# Altium PCB Arduino_pads.PcbDoc
Units mm, origin at the board's own origin, x right, y up, seen from the top; angles counter-clockwise.
Board outline 197.87 x 103.12 mm, 2 copper layers (Top Layer, Bottom Side); 113 components, 62 nets, 325 pads, 0 vias.
Unrouted connection lines stored in the file: 35.
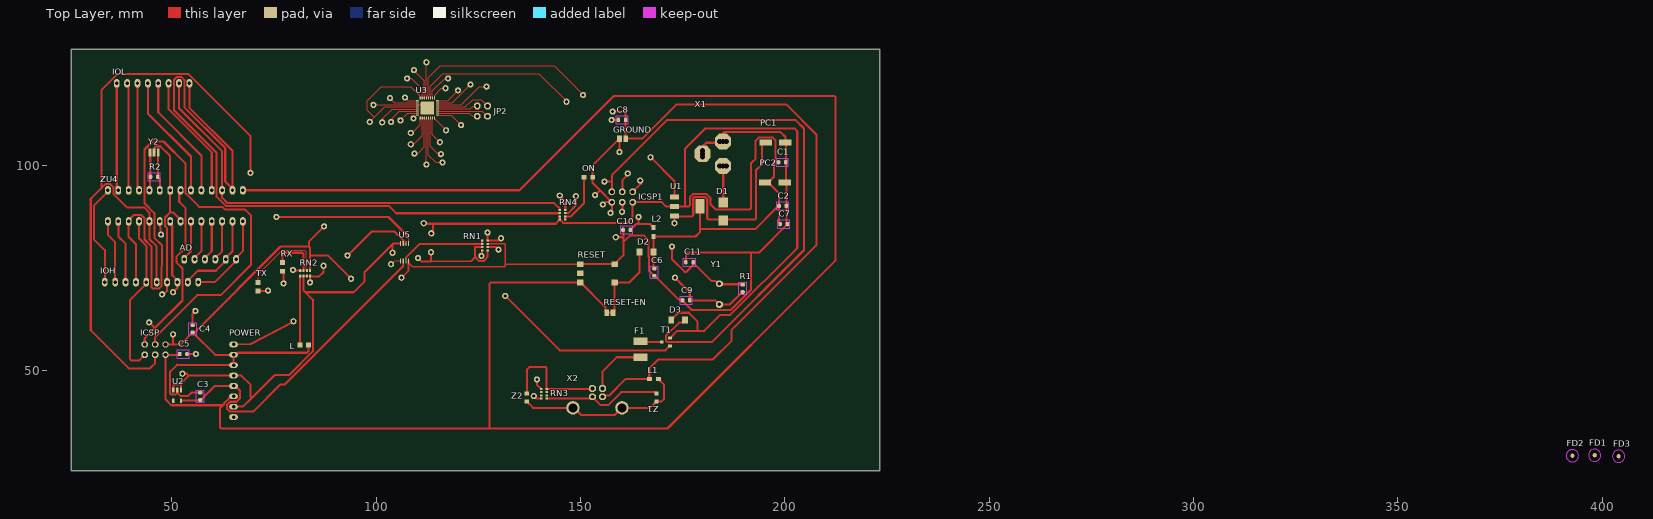
[diagram p0: Top Layer view]
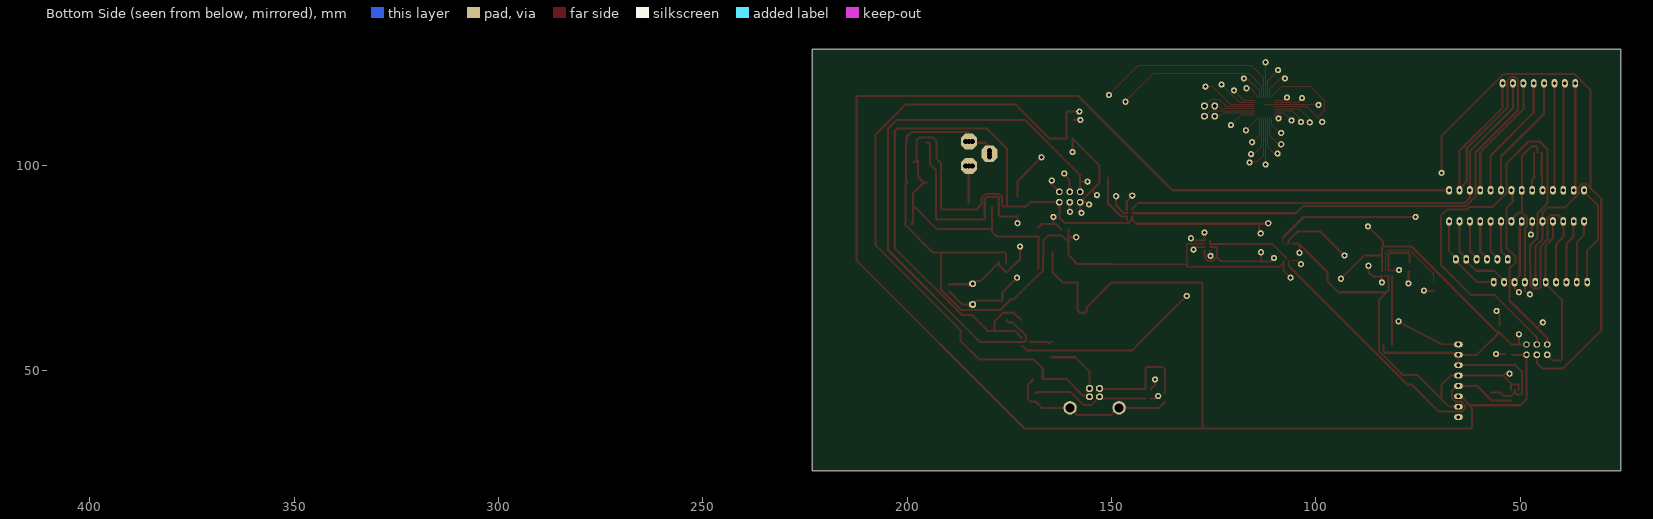
[diagram p1: Bottom Side view, seen from below]

## Layer stack, top to bottom
Top Solder: solder mask 0.0102, Solder Resist, Dk 3.5
Top Layer: signal copper 0.0356
Dielectric 1: dielectric 0.32, FR-4, Dk 4.8
Bottom Side: signal copper (thickness not stored)
Bottom Solder: solder mask 0.0102, Solder Resist, Dk 3.5

## Board outline
25.4,25.4 223.266,25.4 223.266,128.524 25.4,128.524

## Design rules (kind name [scope] priority, off if disabled: settings)
Clearance [All] p1: gap=0.254 ignorepadtopadclearanceinfootprint=FALSE
DiffPairsRouting [All] p1: maxlimit=0.254 minlimit=0.254 mostfreqgap=0.254 toplayer_minwidth=0.381 toplayer_maxwidth=0.381 toplayer_prefwidth=0.381 bottomlayer_minwidth=0.381 bottomlayer_maxwidth=0.381 bottomlayer_prefwidth=0.381 substack1={21367B57-AEF0-4E4E-8D23-0A43C6DC3519} toplayer_{21367b57-aef0-4e4e-8d23-0a43c6dc3519}_minwidth=0.381 toplayer_{21367b57-aef0-4e4e-8d23-0a43c6dc3519}_maxwidth=0.381 toplayer_{21367b57-aef0-4e4e-8d23-0a43c6dc3519}_prefwidth=0.381 bottomlayer_{21367b57-aef0-4e4e-8d23-0a43c6dc3519}_minwidth=0.381 bottomlayer_{21367b57-aef0-4e4e-8d23-0a43c6dc3519}_maxwidth=0.381 bottomlayer_{21367b57-aef0-4e4e-8d23-0a43c6dc3519}_prefwidth=0.381 maxuncoupledlength=12.7
HoleSize [All] p1: absolutevalues=TRUE maxlimit=2 minlimit=0.025 maxpercent=80.000 minpercent=20.000
PolygonConnect [All] p1: connectstyle=Relief reliefconductorwidth=0.254 reliefentries=4 polygonreliefangle="90 Angle" airgapwidth=0.254
RoutingLayers [All] p1: top layer_v5=TRUE bottom layer_v5=FALSE
RoutingVias [All] p1: holewidth=0.711 width=1.27 viastyle="Through Hole" minholewidth=0.711 minwidth=1.27 maxholewidth=0.711 maxwidth=1.27
SolderMaskExpansion [All] p1: expansion=0.102 istentingtop=FALSE
SupplyNets "Schematic Supply Nets_1" [InNet('+5V')] p1: voltage=0.000
SupplyNets "Schematic Supply Nets" [InNet('GND')] p2: voltage=0.000
Width [All] p1: maxlimit=0.254 minlimit=0.254 preferedwidth=0.254 substack1={21367B57-AEF0-4E4E-8D23-0A43C6DC3519} toplayer_{21367b57-aef0-4e4e-8d23-0a43c6dc3519}_minwidth=0.2 toplayer_{21367b57-aef0-4e4e-8d23-0a43c6dc3519}_maxwidth=0.508 toplayer_{21367b57-aef0-4e4e-8d23-0a43c6dc3519}_prefwidth=0.508
27 further rules are at their usual default settings.

## Components (designator, comment, footprint, x,y, rotation, side; value= is the part's Value field where it differs from the comment)
AD "6x1F-H8.5" 1X06 59.374,77.146 r0 top
C1 "100n" C0603-ROUND 199.328,100.895 r180 top
C2 "100n" C0603-ROUND 199.455,90.227 r180 top
C3 "1u" C0603-ROUND 56.961,43.618 r270 top
C4 "100n" C0603-ROUND 55.056,60.128 r90 top
C5 "100n" C0603-ROUND 52.832,53.975 r180 top
C6 "100n" C0603-ROUND 168.086,73.971 r90 top
C7 "100n" C0603-ROUND 199.709,85.782 r0 top
C8 "1u" C0603-ROUND 160.147,111.252 r0 top
C9 "22p" C0603-ROUND 175.833,67.113 r180 top
C10 "100n" C0603-ROUND 161.29,84.328 r0 top
C11 "22p" C0603-ROUND 176.657,76.454 r180 top
D1 "M7" SMB 184.912,88.859 r90 top
D2 "CD1206-S01575" MINIMELF 166.132,78.924 r180 top
D3 "CD1206-S01575" MINIMELF 173.879,62.287 r0 top
F1 "MF-MSMF050-2 500mA" L1812 164.657,55.13 r270 top
FD1 "FIDUCIALMOUNT" FIDUCIA-MOUNT 398.145,29.21 r0 top
FD2 "FIDUCIALMOUNT" FIDUCIA-MOUNT 392.684,29.083 r0 top
FD3 "FIDUCIALMOUNT" FIDUCIA-MOUNT 403.987,28.956 r0 top
GROUND "SJ" SJ 160.274,106.68 r0 top
ICSP "3x2 M" 2X03 45.912,55.048 r0 top
ICSP1 "3x2 M" 2X03 160.212,92.386 r180 top
IOH "10x1F-H8.5" 1X10 45.023,71.558 r0 top
IOL "8x1F-H8.5" 1X08 45.404,120.199 r180 top
JP2 "2x2 M - NM" 2X02 125.984,113.411 r0 top
L "YELLOW" CHIP-LED0805 82.361,56.191 r270 top
L1 "BLM21" 0805 168.002,47.809 r0 top
L2 "10uH" 0805 167.832,83.834 r90 top
ON "GREEN" CHIP-LED0805 151.923,97.212 r270 top
ORIGIN "TP_SP" TP-SP 70.485,243.332 r90 top
PC1 "47u" PANASONIC_D 197.69,105.721 r180 top
PC2 "47u" PANASONIC_D 197.55,95.942 r180 top
POWER "8x1F-H8.5" 1X08 65.089,47.428 r90 top
R1 "1M" R0603-ROUND 189.676,70.034 r90 top
R2 "1M" R0603-ROUND 45.658,97.339 r180 top
RESET "TS42031-160R-TR-7260" TS42 154.116,73.717 r0 top
RESET-EN "SJ" SJ 157.164,64.065 r180 top
RN1 "10K" CAY16 126.597,80.518 r270 top
RN2 "1K" CAY16 82.615,73.717 r0 top
RN3 "22R" CAY16 141.035,44.253 r270 top
RN4 "1K" CAY16 145.582,88.03 r270 top
RX "YELLOW" CHIP-LED0805 77.089,75.277 r180 top
T1 "FDN340P" SOT-23 170.88,56.953 r270 top
TP_0 "TP_SP" TP-SP 139.192,238.76 r90 top
TP_1 "TP_SP" TP-SP 156.972,238.76 r90 top
TP_2 "TP_SP" TP-SP 391.541,250.698 r90 top
TP_3 "TP_SP" TP-SP 403.225,250.698 r90 top
TP_3V3 "TP_SP" TP-SP 453.644,171.958 r90 top
TP_4 "TP_SP" TP-SP 414.909,250.698 r90 top
TP_5 "TP_SP" TP-SP 422.275,250.698 r90 top
TP_5V "TP_SP" TP-SP 487.934,171.704 r90 top
TP_5V1 "TP_SP" TP-SP 496.824,171.704 r90 top
TP_6 "TP_SP" TP-SP 429.641,250.698 r90 top
TP_7 "TP_SP" TP-SP 447.421,250.698 r90 top
TP_8 "TP_SP" TP-SP 436.88,224.282 r90 top
TP_9 "TP_SP" TP-SP 442.976,208.28 r90 top
TP_10 "TP_SP" TP-SP 460.756,208.28 r90 top
TP_11 "TP_SP" TP-SP 423.672,192.659 r90 top
TP_12 "TP_SP" TP-SP 431.8,192.659 r90 top
TP_13 "TP_SP" TP-SP 478.79,192.659 r90 top
TP_A0 "TP_SP" TP-SP 472.44,223.901 r90 top
TP_A1 "TP_SP" TP-SP 257.048,249.428 r90 top
TP_A2 "TP_SP" TP-SP 270.256,249.428 r90 top
TP_A3 "TP_SP" TP-SP 279.146,249.428 r90 top
TP_A4 "TP_SP" TP-SP 308.356,249.428 r90 top
TP_A5 "TP_SP" TP-SP 317.246,249.428 r90 top
TP_AREF "TP_SP" TP-SP 494.665,192.659 r90 top
TP_CMP "TP_SP" TP-SP 484.378,147.066 r90 top
TP_D+ "TP_SP" TP-SP 453.644,192.659 r90 top
TP_D- "TP_SP" TP-SP 444.754,192.659 r90 top
TP_DTR "TP_SP" TP-SP 246.634,249.428 r90 top
TP_GATE "TP_SP" TP-SP 437.261,147.066 r90 top
TP_LCMD "TP_SP" TP-SP 472.44,147.066 r90 top
TP_LL "TP_SP" TP-SP 463.804,171.958 r90 top
TP_MISO2 "TP_SP" TP-SP 396.621,272.669 r90 top
TP_MOSI2 "TP_SP" TP-SP 361.061,272.669 r90 top
TP_ONL "TP_SP" TP-SP 429.26,171.958 r90 top
TP_PB4 "TP_SP" TP-SP 350.647,272.669 r90 top
TP_PB5 "TP_SP" TP-SP 424.688,272.669 r90 top
TP_PB6 "TP_SP" TP-SP 332.105,272.669 r90 top
TP_PB7 "TP_SP" TP-SP 386.207,272.669 r90 top
TP_PWRIN "TP_SP" TP-SP 449.072,147.066 r90 top
TP_RESET "TP_SP" TP-SP 438.658,172.212 r90 top
TP_RESET2 "TP_SP" TP-SP 409.829,272.669 r90 top
TP_RX "TP_SP" TP-SP 52.705,243.332 r90 top
TP_RXL "TP_SP" TP-SP 184.912,238.76 r90 top
TP_SCK2 "TP_SP" TP-SP 374.269,272.669 r90 top
TP_SCL "TP_SP" TP-SP 320.294,272.923 r90 top
TP_SDA "TP_SP" TP-SP 309.88,272.923 r90 top
TP_TX "TP_SP" TP-SP 61.595,243.332 r90 top
TP_TXL "TP_SP" TP-SP 437.007,250.698 r90 top
TP_UGND "TP_SP" TP-SP 172.974,238.76 r90 top
TP_USBVCC "TP_SP" TP-SP 443.992,223.901 r90 top
TP_USH "TP_SP" TP-SP 424.561,223.901 r90 top
TP_VIN "TP_SP" TP-SP 462.28,147.066 r90 top
TP_VUCAP "TP_SP" TP-SP 458.978,223.901 r90 top
TP_XT1 "TP_SP" TP-SP 298.45,249.428 r90 top
TP_XT2 "TP_SP" TP-SP 450.342,208.28 r90 top
TP_XT3 "TP_SP" TP-SP 288.036,249.428 r90 top
TP_XT4 "TP_SP" TP-SP 481.33,223.901 r90 top
TP_XUSB "TP_SP" TP-SP 462.534,192.659 r90 top
TX "YELLOW" CHIP-LED0805 71.12,70.451 r180 top
U1 "NCP1117ST50T3G" SOT223 176.087,90.1 r270 top
U2 "LP2985-33DBVR" SOT23-DBV 51.307,43.842 r180 top
U3 "ATMEGA16U2-MU(R)" MLF32 112.522,114.173 r0 top
U5 "LMV358IDGKR" MSOP08 106.934,78.867 r0 top
X1 "POWERSUPPLY_DC21MMX" POWERSUPPLY_DC-21MM 184.926,106.33 r0 top
X2 "USB-B_TH" PN61729 154.136,40.813 r0 top
Y1 "16MHz" QS 183.961,68.637 r270 top
Y2 "CSTCE16M0V53-R0 16MHZ" RESONATOR 45.658,103.308 r0 top
Z1 "CG0603MLC-05E" CT/CN0603 168.594,43.348 r270 top
Z2 "CG0603MLC-05E" CT/CN0603 136.844,43.348 r270 top
ZU4 "ATMEGA328P-PU" DIL28-3 50.865,90.227 r180 top

## Footprints (in the part's own frame and the unit in brackets; to place one, negate y for a bottom-side part, rotate by r counter-clockwise, add the part's x,y. Pads: shape width x height; smd on the part's side, far side on the other; paste and mask are expansions set on the pad)
1X06 [mil] "1X06"
  oval 56x84 / inner round 0 / far side oval 56x84 hole 33.46: 1(-250,0) 2(-150,0) 3(-50,0) 4(50,0) 5(150,0) 6(250,0)
1X08 [mil] "1X08"
  oval 56x84 / inner round 0 / far side oval 56x84 hole 33.46: 1(-350,0) 2(-250,0) 3(-150,0) 4(-50,0) 5(50,0) 6(150,0) 7(250,0) 8(350,0)
1X10 [mil] "1X10"
  oval 56x84 / inner round 0 / far side oval 56x84 hole 33.46: 1(-450,0) 2(-350,0) 3(-250,0) 4(-150,0) 5(-50,0) 6(50,0) 7(150,0) 8(250,0) 9(350,0) 10(450,0)
2X02 [mil] "2X02"
  oct 66x66 / inner round 0 / far side oct 66x66 hole 37.4: 1(-50,-50) 2(-50,50) 3(50,-50) 4(50,50)
2X03 [mm] "2X03"
  oct 1.55x1.55 / inner round 0 / far side oct 1.55x1.55 hole 0.95: 1(-2.54,-1.27) 2(-2.54,1.27) 3(0,-1.27) 4(0,1.27) 5(2.54,-1.27) 6(2.54,1.27)
0805 [mm] "0805"
  rrect5% 1.2x1 smd: 1(-1.1,0) 2(1.1,0)
C0603-ROUND [mil] "C0603-ROUND"
  rrect80% 35.37x43.31 smd: 1(-35,0) 2(35,0)
  Top Layer keep-out lines w2: 57.99,38.7 57.99,-38.7 -57.99,-38.7 -57.99,38.7 57.99,38.7
CAY16 [mm] "CAY16"
  rrect10% 0.5x0.65 smd: 1(-1.2,-0.675) 2(-0.4,-0.675) 3(0.4,-0.675) 4(1.2,-0.675) 5(1.2,0.675) 6(0.4,0.675) 7(-0.4,0.675) 8(-1.2,0.675)
CHIP-LED0805 [mm] "CHIP-LED0805"
  rrect4% 1.2x1.2 smd: A(0,-1.05) C(0,1.05)
CT/CN0603 [mm] "CT/CN0603"
  rrect5% 1x1 smd: 1(-1,0) 2(1,0)
DIL28-3 [mil] "DIL28-3"
  oval 56x84 / inner round 0 / far side oval 56x84 hole 33.46: 1(-650,-150) 2(-550,-150) 3(-450,-150) 4(-350,-150) 5(-250,-150) 6(-150,-150) 7(-50,-150) 8(50,-150) 9(150,-150) 10(250,-150) 11(350,-150) 12(450,-150) 13(550,-150) 14(650,-150) 15(650,150) 16(550,150) 17(450,150) 18(350,150) 19(250,150) 20(150,150) 21(50,150) 22(-50,150) 23(-150,150) 24(-250,150) 25(-350,150) 26(-450,150) 27(-550,150) 28(-650,150)
FIDUCIA-MOUNT [mil] "FIDUCIA-MOUNT"
  rrect100% 40x40 smd: P$1(0,0)
  Top Layer keep-out circle w5: c0,0 r59.06
L1812 [mm] "L1812"
  rrect2% 1.9x3.4 smd: 1(-1.95,0) 2(1.95,0)
MINIMELF [mm] "MINIMELF"
  rrect3% 1.4x1.8 smd: A(1.7,0) C(-1.7,0)
MLF32 [mm] "MLF32"
  rrect80% 0.7x0.28 smd: 1(-2.45,1.75) 2(-2.45,1.25) 3(-2.45,0.75) 4(-2.45,0.25) 5(-2.45,-0.25) 6(-2.45,-0.75) 7(-2.45,-1.25) 8(-2.45,-1.75) 17(2.45,-1.75) 18(2.45,-1.25) 19(2.45,-0.75) 20(2.45,-0.25) 21(2.45,0.25) 22(2.45,0.75) 23(2.45,1.25) 24(2.45,1.75)
  rrect80% 0.28x0.7 smd: 9(-1.75,-2.45) 10(-1.25,-2.45) 11(-0.75,-2.45) 12(-0.25,-2.45) 13(0.25,-2.45) 14(0.75,-2.45) 15(1.25,-2.45) 16(1.75,-2.45) 25(1.75,2.45) 26(1.25,2.45) 27(0.75,2.45) 28(0.25,2.45) 29(-0.25,2.45) 30(-0.75,2.45) 31(-1.25,2.45) 32(-1.75,2.45)
  rrect15% 3.254x3.254 smd paste+0 mask+0: 33(0,0)
MSOP08 [mm] "MSOP08"
  rrect16% 0.3x1.2 smd: 1(-0.976,-2.113) 2(-0.326,-2.113) 3(0.324,-2.113) 4(0.974,-2.113) 5(0.974,2.112) 6(0.324,2.112) 7(-0.326,2.112) 8(-0.976,2.112)
PANASONIC_D [mm] "PANASONIC_D"
  rrect3% 3x1.4 smd: +(2.4,0) -(-2.4,0)
PN61729 [mil] "PN61729"
  oct 66x66 / inner round 0 / far side oct 66x66 hole 37.4: 1(49.21,185.43) 2(-49.21,185.43) 3(-49.21,106.69) 4(49.21,106.69)
  round 129.91 / inner round 0 / far side round 129.91 hole 86.61: P$1(-236.22,0) P$2(236.22,0)
POWERSUPPLY_DC-21MM [mil] "POWERSUPPLY_DC-21MM"
  oct 157.48x157.48 / inner round 0 / far side oct 157.48x157.48 hole 51.18: 1(-200,-132) 2(-3,-250) 3(-3,-14)
  round 76.77 / inner round 0 / far side round 76.77 hole 51.18: 4(-200,-162) 5(-200,-102) 6(-33,-14) 7(27,-14) 8(-33,-250) 9(27,-250)
QS [mil] "QS"
  oct 66x66 / inner round 0 / far side oct 66x66 hole 33.46: 1(-100,0) 2(100,0)
R0603-ROUND [mil] "R0603-ROUND"
  rrect80% 35.37x43.31 smd: 1(-35,0) 2(35,0)
  Top Layer keep-out lines w2: -57.99,38.7 -57.99,-38.7 57.99,-38.7 57.99,38.7 -57.99,38.7
RESONATOR [mm] "RESONATOR"
  rrect7% 0.7x2 smd: 1(-1,0) 2(0,0) 3(1,0)
SJ [mil] "SJ"
  rrect4% 46x63 smd: 1(-30,0) 2(30,0)
SMB [mm] "SMB"
  rrect2% 2.4x2.4 smd: A(2.2,0) C(-2.2,0)
SOT23-DBV [mm] "SOT23-DBV"
  rrect9% 0.55x1.2 smd: 1(-0.95,-1.3) 2(0,-1.3) 3(0.95,-1.3) 4(0.95,1.3) 5(-0.95,1.3)
SOT223 [mil] "SOT223"
  rrect4% 48x88 smd: 1(-91,-122) 2(0,-122) 3(91,-122)
  rrect2% 141.73x86.61 smd: 4(0,122.01)
SOT-23 [mil] "SOT-23"
  rrect6% 31x35 smd: 1(1,-40) 2(-37,40) 3(39,40)
TP-SP [mm] "TP-SP"
TS42 [mm] "TS42"
  rrect15% 1.6x1.4 smd: 1(-4.2,2.25) 2(4.2,2.25) 3(-4.2,-2.25) 4(4.2,-2.25)
  rrect15% 1.6x1.4 smd paste+0: 5(-4.2,0)

## Part data
AD: library part PINHD-1X6, "PIN HEADER", DeviceSetName=PINHD-1X6, GateName_1=A, LibraryName=SmartPrj, SymbolName_1=PINHD6
C1 C2 C3 C4 C5 C6 C7 C8 C9 C10 C11: library part C-EU0603-RND, "CAPACITOR, European symbol", DeviceName=0603-RND, DeviceSetName=C-EU, GateName_1=G$1, LibraryName=SmartPrj, SymbolName_1=C-EU
D1: library part DIODE-SMB, "DIODE", DeviceName=SMB, DeviceSetName=DIODE-, GateName_1=G$1, LibraryName=diode, SymbolName_1=D
D2 D3: library part DIODE-MINIMELF, "DIODE", DeviceName=MINIMELF, DeviceSetName=DIODE-, GateName_1=G$1, LibraryName=diode, SymbolName_1=D
F1: library part L-EUL1812, "INDUCTOR, European symbol", DeviceName=L1812, DeviceSetName=L-EU, GateName_1=G$1, LibraryName=rcl, SymbolName_1=L-EU
GROUND RESET-EN: "SMD solder JUMPER", DeviceSetName=SJ, GateName_1=1, LibraryName=jumper, SymbolName_1=SJ
ICSP ICSP1: library part PINHD-2X3, "PIN HEADER", DeviceSetName=PINHD-2X3, GateName_1=A, LibraryName=SmartPrj, SymbolName_1=PINH2X3
IOH: library part PINHD-1X10_ARD, "PIN HEADER", DeviceSetName=PINHD-1X10_ARD, GateName_1=A, LibraryName=SmartPrj, SymbolName_1=PINHD10
IOL POWER: library part PINHD-1X8, "PIN HEADER", DeviceSetName=PINHD-1X8, GateName_1=A, LibraryName=SmartPrj, SymbolName_1=PINHD8
JP2: library part PINHD-2X2, "PIN HEADER", DeviceSetName=PINHD-2X2, GateName_1=A, LibraryName=SmartPrj, SymbolName_1=PINH2X2
L ON RX TX: library part LEDCHIP-LED0805, "LED   OSRAM: - CHIPLED LG R971, LG N971, LY N971, LG Q971, LY Q971, LO R971, LY R971 LH N974, LH R974 LS Q976, LO Q976, LY Q976 LO Q996 - Hyper CHIPLED LW Q18S LB Q993, LB Q99A, LB R99A - SideLED LS A670, LO A670, LY A670, LG A670, LP A670 LB A673, LV A673, LT A673, LW A673 LH A674 LY A675 LS A676, LA A676, LO A676, LY A676, LW A676 LS A679, LY A679, LG A679 -  Hyper Micro SIDELEDÂ® LS Y876, LA Y876, LO Y876, LY Y876 LT Y87S - SmartLED LW L88C, LW L88S LB L89C, LB L89S, LG L890 LS L89K, LO L89K, LY L89K LS L896, LA L896, LO L896, LY L896 - TOPLED LS T670, LO T670, LY T670, LG T670, LP T670 LSG T670, LSP T670, LSY T670, LOP T670, LYG T670 LG T671, LOG T671, LSG T671 LB T673, LV T673, LT T673, LW T673 LH T674 LS T676, LA T676, LO T676, LY T676, LB T676, LH T676, LSB T676, LW T676 LB T67C, LV T67C, LT T67C, LS T67K, LO T67K, LY T67K, LW E67C LS E67B, LA E67B, LO E67B, LY E67B, LB E67C, LV E67C, LT E67C LW T67C LS T679, LY T679, LG T679 LS T770, LO T770, LY T770, LG T770, LP T770 LB T773, LV T773, LT T773, LW T773 LH T774 LS E675, LA E675, LY E675, LS T675 LS T776, LA T776, LO T776, LY T776, LB T776 LHGB T686 LT T68C, LB T68C - Hyper Mini TOPLEDÂ® LB M676 - Mini TOPLED SantanaÂ® LG M470 LS M47K, LO M47K, LY M47K    Source: http://www.osram.convergy.de   LUXEON: - LUMILEDÂ® LXK2-PW12-R00, LXK2-PW12-S00, LXK2-PW14-U00, LXK2-PW14-V00 LXK2-PM12-R00, LXK2-PM12-S00, LXK2-PM14-U00 LXK2-PE12-Q00, LXK2-PE12-R00, LXK2-PE12-S00, LXK2-PE14-T00, LXK2-PE14-U00 LXK2-PB12-K00, LXK2-PB12-L00, LXK2-PB12-M00, LXK2-PB14-N00, LXK2-PB14-P00, LXK2-PB14-Q00 LXK2-PR12-L00, LXK2-PR12-M00, LXK2-PR14-Q00, LXK2-PR14-R00 LXK2-PD12-Q00, LXK2-PD12-R00, LXK2-PD12-S00 LXK2-PH12-R00, LXK2-PH12-S00 LXK2-PL12-P00, LXK2-PL12-Q00, LXK2-PL12-R00    Source: www.luxeon.com   KINGBRIGHT:   KA-3528ASYC Source: www.kingbright.com", DeviceName=CHIP-LED0805, DeviceSetName=LED, GateName_1=G$1, LibraryName=led, SymbolName_1=LED
L1: library part WE-CBF_0805, "SMD EMI Suppression Ferrite Beads - excellent anti-EMI properties - low DCR - impedances till 3000 ohms - rated current up to 6 A", DeviceName=_0805, DeviceSetName=WE-CBF, GateName_1=G$1, LibraryName=wuerth-elektronik, SymbolName_1=L
L2: library part 0715_CV201210-100K, "10uH 0805", CASE=0805, DeviceSetName=0715_CV201210-100K, GateName_1=G$1, LibraryName=Induttanze, MONTHLY_USAGE=_____, PART_NUMBER=CV201210-100K, PRICE=_____, SUPPLIER=_____, SymbolName_1=L, TYPE=Induttanze
PC1 PC2: library part CPOL-EUD, "POLARIZED CAPACITOR, European symbol", +=+, DeviceName=D, DeviceSetName=CPOL-EU, GateName_1=G$1, LibraryName=rcl, SymbolName_1=CPOL
R1 R2: library part R-EU_R0603, "RESISTOR, European symbol", DeviceName=R0603, DeviceSetName=R-EU_, GateName_1=G$1, LibraryName=SmartPrj, SymbolName_1=R-EU
RESET: library part TS42, "TS42 Dongnan Electronics Tact switch VDC 12V - 50mA", DeviceSetName=TS42, GateName_1=G$1, LibraryName=SmartPrj, SymbolName_1=ST-MOD_V1.4_TS42
RN1 RN2 RN3 RN4: library part 4R-NCAY16, "Array Chip Resistor   Source: RS Component / Phycomp", DeviceName=CAY16, DeviceSetName=4R-N, GateName_1=A, GateName_2=B, GateName_3=C, GateName_4=D, LibraryName=resistor-dil, SymbolName_1=R1NV, SymbolName_2=R1NV, SymbolName_3=R1NV, SymbolName_4=R1NV
T1: library part PMOSSOT23, "MOS FET", DeviceSetName=PMOSSOT23, GateName_1=A, LibraryName=zetex, SymbolName_1=P_MOSFET
U1: library part MC33269ST*, "Adjustable Output Low Dropout Voltage Regulator 800 mA   Source: http://www.onsemi.com/pub/Collateral/MC33269-D.PDF", DeviceSetName=MC33269ST*, GateName_1=G$1, LibraryName=linear, SymbolName_1=VREG-O2
U2: library part LP2985-XXDBVR, "ULTRALOW-POWER 50-mA LOW-DROPOUT LINEAR REGULATORS   50-mA Low-Dropout Regulator Source: http://focus.ti.com/lit/ds/symlink/tps77001.pdf", DeviceSetName=LP2985-XXDBVR, GateName_1=G$1, LibraryName=SmartPrj, SymbolName_1=LP2985-XXDBVR
U3: library part ATMEGA16U2-MU, DeviceName=MU, DeviceSetName=ATMEGA16U2-, GateName_1=G$1, LibraryName=SmartPrj, SymbolName_1=ATMEL_MEGA8U2
U5: library part LMV358?*MM, "Dual General Purpose, Low Voltage, Rail-to-Rail Output Operational Amplifiers   Source: http://www.national.com/mpf/LM/LMV321.html http://www.national.com/dt/lmv_qual.pdf", DeviceName=MM, DeviceSetName=LMV358?*, GateName_1=A, GateName_2=B, GateName_3=P, LibraryName=linear, SymbolName_1=OPAMP, SymbolName_2=OPAMP, SymbolName_3=PWR+-, V+=V+, V-=V-
X2: library part PN61729, "BERG USB connector", DeviceSetName=PN61729, GateName_1=G$1, LibraryName=SmartPrj, SymbolName_1=J11, USB=USB
Y1: library part XTAL/S, "CRYSTAL", DeviceSetName=XTAL/S, GateName_1=G$1, LibraryName=SmartPrj, SymbolName_1=XTAL
Y2: library part RESONATORMU, DeviceName=MU, DeviceSetName=RESONATOR, GateName_1=G$1, LibraryName=SmartPrj, SymbolName_1=RESONATOR
Z1 Z2: library part VARISTORCN0603, "VARISTOR", DeviceName=CN0603, DeviceSetName=VARISTOR, GateName_1=G$1, LibraryName=varistor, SymbolName_1=VARISTOR
ZU4: "MICROCONTROLLER   4 Kbytes FLASH   128 bytes SRAM   256 bytes EEPROM   UART   6-channel 10 bit ADC", DeviceName=PU, DeviceSetName=ATMEGA328P-, GateName_1=G$1, LibraryName=SmartPrj, SymbolName_1=20-I/O-2
FD1 FD2 FD3: DeviceSetName=FIDUCIALMOUNT, GateName_1=G$1, LibraryName=SmartPrj, SymbolName_1=FIDUCIAL
ORIGIN TP_0 TP_1 TP_2 TP_3 TP_3V3 TP_4 TP_5 TP_5V TP_5V1 TP_6 TP_7 TP_8 TP_9 TP_10 TP_11 TP_12 TP_13 TP_A0 TP_A1 TP_A2 TP_A3 TP_A4 TP_A5 TP_AREF TP_CMP TP_D+ TP_D- TP_DTR TP_GATE TP_LCMD TP_LL TP_MISO2 TP_MOSI2 TP_ONL TP_PB4 TP_PB5 TP_PB6 TP_PB7 TP_PWRIN TP_RESET TP_RESET2 TP_RX TP_RXL TP_SCK2 TP_SCL TP_SDA TP_TX TP_TXL TP_UGND TP_USBVCC TP_USH TP_VIN TP_VUCAP TP_XT1 TP_XT2 TP_XT3 TP_XT4 TP_XUSB: DeviceSetName=TP_SP, GateName_1=G$1, LibraryName=SmartPrj, SymbolName_1=TP-SP
X1: DeviceName=X, DeviceSetName=POWERSUPPLY_DC21MM, GateName_1=G$1, LibraryName=SmartPrj, SymbolName_1=POWERSUPPLY_DC21PWR

## Free pads (board coordinates)
  round 1.524 hole 0.762: 28(153.543,92.837) 30(155.448,90.551) 32(157.353,88.519) 33(164.211,87.503) 34(172.974,85.979) 35(47.371,83.185) 36(158.623,82.55) 40(47.625,68.58) 41(50.292,69.088) 42(55.753,64.516) 43(52.578,49.149) 44(44.45,61.722) 45(55.88,53.975) 46(79.629,74.549) 47(87.122,75.565) 48(92.964,78.105) 49(104.013,78.74) 51(125.73,77.978) 54(103.632,75.946) 57(127.254,83.693) 58(130.556,82.296) 60(129.921,79.502) 61(69.215,98.298) 62(50.292,58.801) 63(73.533,69.469) 64(77.343,71.247) 65(75.565,87.503) 66(83.817,71.504) 67(93.853,72.39) 68(87.249,85.217) 69(106.172,72.644) 70(139.319,47.752) 71(138.557,43.688) 72(131.572,68.199) 73(110.236,77.47) 74(111.633,85.979) 75(113.474,83.502) 76(113.411,78.867) 77(148.844,92.583) 78(144.907,92.71) 80(157.861,113.284) 81(157.607,111.252) 82(161.544,98.171) 83(164.592,96.393) 84(167.134,102.106) 85(159.512,103.378) 86(160.147,88.773) 87(173.101,72.644) 88(172.339,80.264) 89(155.829,96.139) 90(99.314,114.935) 91(109.093,111.633) 92(105.918,111.125) 93(103.632,110.744) 94(101.473,110.661) 95(98.425,110.775) 96(79.756,61.976) 97(103.378,116.586) 98(107.061,116.713) 99(109.22,123.444) 100(107.569,121.412) 101(116.967,118.999) 102(117.602,121.412) 103(150.622,117.348) 104(146.558,115.697) 105(120.777,109.982) 106(120.015,118.491) 107(123.063,119.888) 108(127,119.38) 109(117.094,108.712) 110(115.57,105.791) 111(115.824,102.87) 112(116.205,100.838) 113(109.347,102.997) 114(108.458,105.283) 115(108.458,108.077) 116(112.268,100.33) 117(112.272,125.349)

## Nets (pads, with @x,y where several pads share a name; then routed paths per layer and width w, separated by ;. In a path a pad name is that pad's centre, name@x,y a point inside that pad or via, vN(x,y) a via of type N, cw(c..) or ccw(c..) an arc to the next point about the centre after c; other vN are vias at no path point)
+3V3: C3.2 POWER.4 U2.5 U5.2 | length 82.5
  Top Layer w0.408: 106.608,75.493 U5.2
  Top Layer w0.508: U2.5 52.257,42.614 52.278,42.635 56.868,42.635 C3.2 57.062,42.729 60.491,46.158 POWER.4 65.445,46.158 66.664,44.939 66.664,43.113 65.848,42.297 64.228,42.297 63.514,41.583 63.514,40.573 64.228,39.859 69.899,39.859 76.544,46.504 77.619,46.504 106.608,75.493
+5V: C1.2 C2.2 C6.2 C7.1 D2.C D3.C ICSP1.2 ICSP.2 L2.1 pad.43 pad.44 pad.49 pad.73 pad.74 pad.75 pad.76 pad.95 PC2.+ POWER.2 POWER.5 RN1.3 RN1.5 RN2.2 RN2.3 RN4.3 RN4.4 T1.2 U1.2 U1.4 U2.1 U2.3 U3.4 U3.32 U5.8 ZU4.7 | length 523
  Top Layer w0.2: pad.95 99.552,111.903 ; 99.568,111.887 99.552,111.903 ; U3.4 109.829,114.423 109.823,114.417 102.067,114.417 99.552,111.903 ; U3.32 110.772,117.066 108.458,119.38 101.219,119.38 97.79,115.951 97.79,113.665 99.552,111.903
  Top Layer w0.508: ICSP.2 43.372,57.85 45.847,60.325 ; pad.44 45.847,60.325 ; U2.3 50.378,45.163 50.378,46.306 50.611,46.539 51.959,46.539 52.257,46.836 ; ZU4.7 52.135,93.434 51.805,93.104 51.805,91.192 53.354,89.643 53.354,80.016 51.119,77.781 51.119,76.384 52.592,74.911 52.592,67.07 45.847,60.325 ; U2.1 52.257,46.836 ; pad.43@52.832,49.149 53.667,49.149 54.118,48.698 ; POWER.2 67.375,41.078 69.387,43.09 ; RN2.3 RN2.2 82.215,69.545 82.679,69.081 ; pad.49 104.013,80.899 ; 105.791,81.026 104.14,81.026 104.013,80.899 ; pad.73 111.148,76.577 113.412,76.602 ; pad.74@111.887,85.852 113.919,85.852 ; pad.76@113.411,78.613 113.412,78.612 113.412,76.602 ; pad.75 113.919,83.947 113.919,85.852 ; RN1.3 124.206,80.118 124.206,77.706 ; RN1.5 127.272,77.724 126.256,76.708 125.204,76.708 124.206,77.706 ; RN4.3 RN4.4 144.909,86.83 144.884,86.806 144.832,86.753 143.93,85.852 113.919,85.852 ; RN4.4@144.974,86.83 145.755,86.049 146.51,86.049 146.514,86.053 161.491,86.053 162.752,87.314 ICSP1.2 169.864,91.116 170.88,90.1 U1.2 175.514,90.1 ; C6.2 168.042,74.86 167.855,75.047 167.855,75.091 167.832,75.114 D2.C L2.1 178.119,82.734 179.186,83.801 179.186,84.809 ; T1.2 171.947,57.893 173.674,59.62 178.5,59.62 ; D3.C 172.179,62.487 172.625,62.933 172.825,62.933 173.957,64.065 176.468,64.065 178.627,61.906 178.627,59.747 178.5,59.62 ; U1.4 179.186,84.809 ; PC2.+ PC2.+@195.95,95.942 ; C1.2 198.439,100.939 198.252,101.126 197.677,101.126 ; C2.2 198.566,86.194 198.82,85.94 C7.1 ; 52.257,46.836 54.118,48.698 ; 54.118,48.698 POWER.5 67.024,48.698 69.28,46.442 69.28,43.618 69.387,43.511 69.387,43.09 ; 69.387,43.09 75.146,48.849 78.76,48.849 84.519,54.608 84.519,67.241 82.679,69.081 ; 82.679,69.081 94.481,69.081 97.155,71.755 97.155,74.041 104.013,80.899 ; 113.412,76.602 123.208,76.708 124.206,77.706 ; 175.514,90.1 175.514,104.132 180.532,109.15 202.376,109.15 203.011,108.515 203.011,79.895 186.673,63.557 184.215,63.557 180.278,59.62 178.5,59.62 ; 175.514,90.1 176.519,90.1 176.816,90.397 176.816,92.413 177.573,93.17 180.799,93.17 181.752,92.217 181.752,90.683 183.097,89.338 191.41,89.338 191.708,89.635 191.708,100.641 192.851,101.784 192.851,106.188 193.592,106.929 197.07,106.929 197.677,106.321 197.677,101.126 ; 179.186,84.809 179.484,84.512 192.724,84.512 197.929,89.716 198.099,89.716 198.503,90.12 198.503,90.29 198.566,90.354 198.566,93.326 PC2.+@195.95,95.942 ; PC2.+@195.95,95.942 197.298,97.29 197.298,101.149 197.321,101.126 197.677,101.126
AD0: AD.1 ZU4.23 | length 10
  Top Layer w0.508: AD.1 53.024,77.501 54.675,79.152 ZU4.23
AD1: AD.2 ZU4.24 | length 10
  Top Layer w0.508: AD.2 55.564,77.501 57.215,79.152 ZU4.24
AD2: AD.3 ZU4.25 | length 10
  Top Layer w0.508: AD.3 58.104,77.501 59.755,79.152 ZU4.25
AD3: AD.4 ZU4.26 | length 10
  Top Layer w0.508: AD.4 60.644,77.501 62.295,79.152 ZU4.26
AD4/SDA: AD.5 IOH.9 ZU4.27 | length 22
  Top Layer w0.508: IOH.9 53.913,71.913 56.351,74.352 60.746,74.352 63.184,76.79 AD.5 63.184,77.501 64.835,79.152 ZU4.27
AD5/SCL: AD.6 IOH.10 ZU4.28 | length 21.7
  Top Layer w0.508: IOH.10 60.492,71.558 65.724,76.79 AD.6 65.724,77.501 67.375,79.152 ZU4.28
AREF: C4.2 IOH.8 pad.41 pad.42 ZU4.21 | length 21.6
  Top Layer w0.5: pad.41 51.373,70.169 IOH.8
  Top Layer w0.508: ZU4.21 49.595,85.815 50.103,85.307 50.103,73.214 IOH.8@51.373,71.944 ; C4.2 55.056,63.819 pad.42@55.499,64.262
AVCC: C10.2 L2.2 pad.33 pad.35 ZU4.20 | length 11.7
  Top Layer w0.508: ZU4.20 47.192,83.361 47.34,83.214 pad.35 ; C10.2 162.179,84.372 162.431,84.624 162.475,84.624 163.633,85.782 164.211,85.782 ; pad.33 164.211,85.782 ; L2.2 167.832,85.034 167.586,85.28 167.486,85.28 166.984,85.782 164.211,85.782
CMP: RN1.1 RN1.2 U5.3 | length 20.9
  Top Layer w0.508: 107.25,77.47 107.25,77.55 110.618,80.918 RN1.2 RN1.1
D+: RN3.5 X2.3 Z1.1 | length 29.4
  Top Layer w0.508: RN3.5 152.146,43.053 152.616,43.523 X2.3 154.95,41.459 156.783,41.459 159.958,44.634 168.05,44.634 168.091,44.594 168.348,44.594 Z1.1
D-: RN3.8 X2.2 Z2.1 | length 27.3
  Top Layer w0.508: Z2.1 136.844,50.103 137.563,50.822 141.412,50.822 141.71,50.524 RN3.8 141.714,45.457 152.82,45.457 X2.2
DTR: C5.1 pad.45 pad.47 pad.66 pad.112 RN2.4 U3.13 | length 22.1
  Top Layer w0.2: U3.13@112.776,111.506 112.776,102.616 114.554,100.838 pad.112
  Top Layer w0.508: C5.1 pad.45 ; RN2.4 RN2.4@83.815,73.029 ; pad.66@83.82,71.501 83.815,71.506 RN2.4@83.815,73.029 ; pad.47 87.122,74.041 85.979,72.898 84.113,72.898 83.986,73.025 83.819,73.025 RN2.4@83.815,73.029
GATE_CMD: pad.54 pad.72 T1.3 U5.1 | length 48.7
  Top Layer w0.3: pad.54@103.886,76.073 104.567,76.754 U5.1
  Top Layer w0.508: pad.72 144.907,54.864 170.747,54.864 171.845,55.962 T1.3
GND: C1.1 C2.1 C3.1 C4.1 C6.1 C7.2 C9.2 C10.1 C11.2 GROUND.1 ICSP1.6 ICSP.6 IOH.7 L.C ON.C pad.28 pad.30 pad.32 pad.36 pad.40 pad.62 pad.67 pad.68 pad.69 pad.84 pad.85 pad.90 PC1.- PC2.- POWER.6 POWER.7 RESET.1 RESET.2 RN1.7 RN2.5 U1.1 U2.2 U3.3 U3.33 U5.4 X1.1 X1.3 Y2.2 ZU4.8 ZU4.22 | length 440.4
  Top Layer w0.2: pad.90 112.286,114.917 U3.33@112.53,114.673
  Top Layer w0.4: pad.69 107.908,74.38 U5.4@107.908,76.303 ; U5.4 U5.4@107.908,76.303 ; RN1.7@127.268,80.914 131.338,80.914 131.572,80.68 131.572,75.967 ; RESET.1 131.572,75.967 ; U5.4@107.908,76.303 108.9,75.311 131.338,75.311 131.572,75.545 131.572,75.967
  Top Layer w0.508: Y2.2 45.754,103.404 45.754,104.458 46.112,104.816 47.204,104.816 49.595,102.425 ZU4.8 49.595,88.635 ; pad.40@47.879,68.58 48.006,68.58 48.833,69.407 IOH.7 48.833,84.732 48.325,85.24 48.325,87.365 49.595,88.635 ; ICSP.6 50.294,56.318 ; pad.62 50.294,58.799 50.294,56.318 ; ZU4.22 52.135,86.772 50.272,88.635 49.595,88.635 ; C4.1@55.012,59.239 54.76,58.987 54.76,58.943 52.135,56.318 50.294,56.318 ; C4.1 55.186,59.369 55.686,59.369 76.581,80.264 83.513,80.264 ; C4.1@55.157,59.239 60.618,53.778 POWER.7 ; C3.1 54.802,44.507 54.04,43.745 52.075,43.745 51.328,44.492 51.328,45.121 U2.2 51.286,45.121 51.286,44.492 50.828,44.034 49.886,44.034 49.574,44.346 49.574,49.632 51.307,51.365 51.434,51.238 POWER.6 POWER.7 ; L.C 83.411,54.577 83.114,54.28 66.194,54.28 65.692,53.778 POWER.7 ; RN2.5 83.811,74.396 83.811,78.105 ; pad.68 83.513,81.481 83.513,80.264 ; pad.67 88.138,78.105 83.811,78.105 ; RESET.1 RESET.2 158.416,75.967 158.862,76.413 158.862,76.513 160.466,78.117 160.466,81.337 ; pad.28 154.683,93.977 154.81,93.977 ; pad.30 156.013,91.116 ICSP1.6 ; pad.32@157.48,88.646 157.672,88.838 ICSP1.6 ; pad.36 160.466,82.55 ; pad.85 GROUND.1 152.973,100.141 ON.C 152.973,95.815 154.81,93.977 ; C10.1@160.466,84.388 160.466,82.55 ; pad.84 172.974,96.266 172.974,92.426 U1.1 ; C6.1 167.985,73.082 166.747,74.32 166.747,77.703 166.624,77.826 166.624,81.783 165.419,82.988 162.117,82.988 160.466,81.337 ; C6.1@168.187,73.082 173.925,67.344 174.757,67.344 174.944,67.157 C9.2 ; C9.2@174.944,67.012 177.205,64.751 186.789,64.751 191.708,69.67 191.708,78.797 ; C11.2@175.768,76.2 C11.2 175.768,78.499 176.066,78.797 191.708,78.797 ; X1.3 184.912,106.037 184.912,108.033 185.21,108.331 198.882,108.331 200.152,107.061 200.152,105.783 PC1.- 200.217,105.594 C1.1 200.217,96.209 PC2.- 200.344,95.548 C2.1 200.344,86.036 200.367,86.013 200.411,86.013 200.598,85.826 C7.2 200.598,85.681 193.714,78.797 191.708,78.797 ; 83.513,80.264 83.811,79.966 83.811,78.105 ; 154.81,93.977 ICSP1.6 ; 160.466,81.337 160.466,82.55
IO0: IOL.1 RN4.2 ZU4.2 | length 184
  Top Layer w0.508: IOL.1 54.294,114.23 64.835,103.689 ZU4.2 64.835,94.392 63.057,96.17 63.057,104.389 53.075,114.371 53.075,120.958 52.259,121.774 51.249,121.774 50.535,121.06 50.535,113.606 60.974,103.166 60.974,92.451 63.288,90.138 103.169,90.138 104.896,88.411 RN4.2@144.845,88.411
IO1: IOL.2 RN4.1 ZU4.3 | length 116.4
  Top Layer w0.508: IOL.2 51.754,114.103 62.295,103.562 ZU4.3 62.295,92.208 63.603,90.9 143.537,90.9 144.845,89.592 RN4.1@144.845,89.211
IO2: IOL.3 ZU4.4 | length 30.5
  Top Layer w0.508: IOL.3 49.214,113.849 59.755,103.308 ZU4.4
IO3: IOL.4 ZU4.5 | length 30.5
  Top Layer w0.508: IOL.4 46.674,113.087 57.215,102.546 ZU4.5
IO4: IOL.5 ZU4.6 | length 30.5
  Top Layer w0.508: IOL.5 44.134,112.833 54.675,102.292 ZU4.6
IO5: IOL.6 ZU4.11 | length 26.3
  Top Layer w0.508: IOL.6 41.594,95.021 41.975,94.64 ZU4.11
IO6: IOL.7 ZU4.12 | length 26.3
  Top Layer w0.508: IOL.7 39.054,119.596 39.435,119.215 ZU4.12
IO7: IOL.8 ZU4.13 | length 26.3
  Top Layer w0.508: IOL.8 36.514,95.021 36.895,94.64 ZU4.13
IO8: IOH.1 ZU4.14 | length 25
  Top Layer w0.508: IOH.1 33.593,79.376 30.926,82.043 30.926,90.252 34.355,93.681 ZU4.14
IO9: IOH.2 ZU4.15 | length 15.6
  Top Layer w0.508: ZU4.15 34.355,83.115 36.133,81.337 IOH.2
L13: pad.46 pad.48 RN2.8 U5.6 U5.7 | length 19.8
  Top Layer w0.4: U5.7@106.616,81.352 106.608,81.352 U5.7 U5.6
  Top Layer w0.508: pad.46@79.756,74.422 79.786,74.392 RN2.8 ; pad.48@93.218,78.232 98.933,83.947 104.444,83.947 106.616,81.775 U5.7@106.616,81.352
M8RXD: pad.77 pad.115 RN4.7 U3.9 | length 9.7
  Top Layer w0.2: pad.115@108.781,108.146 110.744,110.109 U3.9@110.744,111.633
  Top Layer w0.508: RN4.7 146.261,88.434 146.981,88.434 148.844,90.297 pad.77@148.844,92.357
M8TXD: pad.78 pad.91 RN4.8 U3.8 | length 5.5
  Top Layer w0.2: pad.91 109.855,112.395 U3.8@110.236,112.395
  Top Layer w0.508: pad.78 146.257,91.36 RN4.8
MISO: ICSP.1 IOH.5 ZU4.18 | length 40.4
  Top Layer w0.508: ZU4.18 41.975,82.226 43.753,80.448 IOH.5 43.753,71.202 39.773,67.222 39.773,52.721 40.071,52.424 42.018,52.424 ICSP.1
MISO2: ICSP1.1 pad.83 pad.105 U3.17 | length 10.2
  Top Layer w0.2: U3.17 118.336,112.423 pad.105
  Top Layer w0.508: ICSP1.1 164.719,95.623 pad.83@164.719,96.266
MOSI: ICSP.4 IOH.4 ZU4.17 | length 159.6
  Top Layer w0.508: IOH.4 41.213,80.829 39.435,82.607 ZU4.17 39.435,86.772 40.654,87.992 42.48,87.992 43.296,87.176 43.296,81.983 44.972,80.306 44.972,70.331 45.172,70.132 45.27,70.034 45.788,69.983 46.798,69.983 47.512,70.697 47.613,80.314 47.613,80.53 47.465,80.678 45.734,82.409 45.734,83.153 45.72,83.167 45.72,84.219 45.734,84.233 45.734,88.434 43.296,90.873 43.296,104 45.271,105.975 47.944,105.975 53.354,100.565 53.354,93.278 56.659,89.973 62.375,89.973 62.972,89.376 67.845,89.376 69.407,87.814 69.407,75.876 61.924,68.393 56.201,68.393 45.912,58.104 ICSP.4
MOSI2: ICSP1.4 pad.86 pad.109 U3.16 | length 6.6
  Top Layer w0.2: U3.16@114.3,111.76 114.3,111.506 pad.109
  Top Layer w0.508: pad.86 160.212,88.838 ICSP1.4
NetL_A: L.A RN2.1 | length 16.9
  Top Layer w0.508: L.A RN2.1@81.311,73.042
NetON_A: ON.A RN4.5 RN4.6 | length 13.1
  Top Layer w0.508: RN4.5@146.195,86.811 146.195,87.611 146.199,87.615 146.431,87.615 147.567,87.615 150.873,90.921 ON.A
NetRN2_6: RN2.6 TX.A | length 21
  Top Layer w0.254: TX.A 71.12,73.533 76.962,79.375 82.371,79.375 82.892,78.854 82.892,74.515 RN2.6
NetRN2_7: RN2.7 RX.A | length 11.5
  Top Layer w0.508: RX.A 77.089,78.442 77.387,78.74 81.914,78.74 82.211,78.442 82.211,74.396 RN2.7
NetTP_USBVCC_X: pad.100 U3.31 | length 6.9
  Top Layer w0.2: pad.100 108.585,121.412 111.272,118.725 U3.31
PB4: JP2.1 U3.18 | length 10.1
  Top Layer w0.2: U3.18 122.789,112.923 123.571,112.141 JP2.1
PB5: JP2.3 U3.19 | length 12.9
  Top Layer w0.2: U3.19 125.972,113.423 JP2.3@127.326,112.069
PB6: JP2.2 U3.20 | length 10.6
  Top Layer w0.2: U3.20 123.059,113.923 123.693,114.557 124.59,114.557 JP2.2 JP2.2@125.092,114.303
PB7: JP2.4 U3.21 | length 13.4
  Top Layer w0.2: U3.21@115.189,114.427 121.793,114.427 123.571,116.205 125.73,116.205 JP2.4
PWRIN: D1.A X1.2 | length 8.9
  Top Layer w0.508: X1.2 184.912,99.919 D1.A
RD+: pad.71 pad.117 RN3.4 U3.29 | length 10.5
  Top Layer w0.2: U3.29 pad.117
  Top Layer w0.508: pad.71@138.811,43.561 139.319,43.053 RN3.4
RD-: pad.70 pad.99 RN3.1 U3.30 | length 10.6
  Top Layer w0.2: pad.99 111.772,120.892 U3.30
  Top Layer w0.508: pad.70 139.319,46.494 140.289,45.524 140.289,45.457 140.293,45.453 RN3.1
RESET: C5.2 D2.A ICSP.5 pad.51 POWER.3 RESET-EN.1 RESET-EN.2 RESET.3 RESET.4 RN1.4 ZU4.1 | length 490.9
  Top Layer w0.508: C5.2 51.943,53.965 51.756,53.778 ICSP.5 48.452,42.868 49.886,41.434 62.55,41.434 ; POWER.3 64.486,43.618 63.927,43.059 63.913,43.059 62.752,41.899 62.752,41.637 62.55,41.434 ; ZU4.1 135.058,94.037 158.172,117.151 212.111,117.151 212.409,116.853 212.409,76.892 171.261,35.744 127.7,35.744 ; pad.51@125.857,78.232 125.922,78.297 RN1.4 ; RESET.3@149.921,71.463 RESET.3 127.998,71.467 127.7,71.169 127.7,35.744 ; RESET.3@150.016,71.467 156.072,65.411 156.072,64.395 RESET-EN.2 RESET-EN.1 ; RESET-EN.1@157.926,64.281 158.316,64.671 RESET.4 161.899,71.467 164.432,74 D2.A ; 62.55,41.434 61.787,40.671 61.787,36.041 62.085,35.744 127.7,35.744
RESET2: D3.A ICSP1.5 pad.60 pad.89 pad.106 RN1.6 U3.24 | length 148.9
  Top Layer w0.2: U3.24@114.935,115.951 117.475,115.951 pad.106
  Top Layer w0.508: RN1.6 129.305,80.118 pad.60 ; pad.89 157.672,96.139 ; ICSP1.5 157.672,96.139 ; D3.A 175.579,62.102 175.133,61.656 174.117,61.656 170.88,58.419 170.88,57.25 171.178,56.953 182.183,56.953 204.662,79.432 204.662,109.15 202.63,111.182 171.126,111.182 157.672,97.728 157.672,96.139
RXLED: pad.64 pad.114 RX.C U3.10 | length 10.6
  Top Layer w0.2: pad.114@108.728,105.283 109.22,105.283 111.272,107.335 U3.10
  Top Layer w0.508: RX.C 77.343,73.973 pad.64@77.343,71.501
SCK: ICSP.3 IOH.6 pad.61 pad.65 U5.5 ZU4.19 | length 205.3
  Top Layer w0.3: U5.5 107.908,82.592
  Top Layer w0.5: pad.65 102.997,87.503 107.908,82.592
  Top Layer w0.508: ICSP.3 45.912,51.746 44.642,50.476 39.435,50.476 30.164,59.747 30.164,91.926 32.744,94.505 ; IOH.6 46.293,80.321 44.515,82.099 ZU4.19 44.515,88.576 43.245,89.846 39.006,89.846 35.676,93.176 35.676,94.796 34.86,95.612 33.85,95.612 32.744,94.505 ; pad.61 69.215,107.358 54.037,122.536 36.771,122.536 32.744,118.508 32.744,94.505
SCK2: ICSP1.3 pad.82 pad.110 U3.15 | length 11.5
  Top Layer w0.2: U3.15 113.772,107.589 pad.110
  Top Layer w0.508: ICSP1.3 160.212,96.458 pad.82@161.671,97.917
SS: IOH.3 ZU4.16 | length 15.6
  Top Layer w0.508: ZU4.16 36.895,82.734 38.673,80.956 IOH.3
TP_VUCAP: C8.1 pad.81 pad.104 U3.27 | length 42.2
  Top Layer w0.2: U3.27 113.272,119.495 116.332,122.555 139.827,122.555 pad.104@146.812,115.57
  Top Layer w0.508: pad.81 C8.1
TXLED: pad.63 pad.113 TX.C U3.11 | length 12.6
  Top Layer w0.2: pad.113 110.109,102.997 111.772,104.66 U3.11
  Top Layer w0.508: TX.C 73.465,69.401 pad.63
UGND: C8.2 GROUND.2 L1.1 pad.80 pad.103 U3.28 X2.4 | length 207.7
  Top Layer w0.2: U3.28 112.772,121.535 115.697,124.46 143.51,124.46 pad.103
  Top Layer w0.508: X2.4 155.684,43.821 156.986,43.821 160.974,47.809 L1.1 166.816,47.895 166.816,50.476 168.975,52.635 182.375,52.635 186.882,57.142 186.882,59.747 207.71,80.575 207.71,107.691 200.409,114.992 173.42,114.992 165.108,106.68 GROUND.2 C8.2 161.036,113.038 160.738,113.336 160.523,113.336 pad.80
USBVCC: F1.1 T1.1 | length 5.5
  Top Layer w0.508: F1.1 165.082,56.655 165.375,56.655 165.648,56.927 T1.1
USHIELD: L1.2 X2.P$1 X2.P$2 Z1.2 Z2.2 | length 42
  Top Layer w0.508: Z2.2 138.379,40.813 X2.P$1 148.412,40.813 150.179,39.046 158.369,39.046 X2.P$2 167.059,40.813 Z1.2 168.63,42.383 169.856,42.383 170.372,42.899 170.372,46.539 169.448,47.463 169.448,47.563 169.202,47.809 L1.2
VIN: D1.C pad.34 pad.57 pad.58 pad.96 PC1.+ POWER.8 RN1.8 U1.3 | length 72.5
  Top Layer w0.508: POWER.8 69.206,56.388 69.328,56.39 pad.96@79.629,61.849 ; pad.57 127.254,81.722 127.258,81.718 RN1.8 130.105,81.718 pad.58@130.429,82.042 ; pad.34 172.988,85.993 U1.3 173.136,87.641 177.281,87.641 177.578,87.939 177.578,92.097 177.889,92.408 180.484,92.408 180.99,91.901 180.99,87.145 181.288,86.848 192.68,86.848 192.978,87.145 192.978,98.99 194.375,100.387 194.375,105.275 194.821,105.721 PC1.+
XT1: C9.1 pad.87 pad.98 R1.1 U3.1 Y1.2 | length 24.8
  Top Layer w0.2: pad.98@107.188,116.459 107.724,115.923 U3.1
  Top Layer w0.508: pad.87 176.722,69.023 C9.1 182.945,67.113 Y1.2 186.527,66.097 189.575,69.145 R1.1
XT2: C11.1 pad.88 pad.97 R1.2 U3.2 Y1.1 | length 32.2
  Top Layer w0.2: pad.97@103.505,116.332 104.414,115.423 U3.2
  Top Layer w0.508: pad.88 172.339,77.216 175.494,74.061 175.915,74.061 177.502,75.648 177.502,76.41 C11.1 ; C11.1@177.612,76.261 182.061,71.812 183.056,71.812 183.691,71.177 Y1.1 184.088,71.05 189.549,71.05 R1.2
XTAL1: R2.1 Y2.3 ZU4.9 | length 9.5
  Top Layer w0.508: Y2.3 46.603,103.252 46.603,97.394 R2.1 46.547,97.181 47.055,96.673 ZU4.9
XTAL2: R2.2 Y2.1 ZU4.10 | length 9.4
  Top Layer w0.508: ZU4.10 44.642,94.164 44.642,97.212 R2.2 44.714,97.394 44.714,103.252 Y2.1
XUSB: F1.2 X2.1 | length 14.9
  Top Layer w0.508: X2.1 155.386,49.714 158.852,53.18 F1.2
pads on no net: FD1.P$1 FD2.P$1 FD3.P$1 POWER.1 RESET.5 RN3.2 RN3.3 RN3.6 RN3.7 U2.4 U3.5 U3.6 U3.7 U3.12 U3.14 U3.22 U3.23 U3.25 U3.26 X1.4 X1.5 X1.6 X1.7 X1.8 X1.9
copper on no net: | length 83
  Top Layer w0.2: 101.473,110.661 101.473,111.506 103.886,113.919 110.109,113.919 ; 103.886,110.836 103.886,111.633 105.676,113.423 110.072,113.423 ; 105.918,111.125 107.716,112.923 110.072,112.923 ; 112.268,100.33 112.268,111.633 ; 113.272,111.723 113.272,104.787 115.189,102.87 115.824,102.87 ; 113.772,116.623 113.772,118.344 116.84,121.412 117.602,121.412 ; 114.272,116.623 114.272,117.32 115.951,118.999 116.967,118.999 ; 114.972,115.423 118.598,115.423 123.19,120.015 ; 115.062,114.935 120.777,114.935 125.222,119.38 127,119.38
  Top Layer w0.508: 179.832,104.775 180.721,105.664 183.007,105.664

## Text inside footprints (layer, text, board x,y; h text height)
U1: Mechanical 7 "2" at 171.76,91.39 h1.26 r270; Mechanical 7 "1" at 171.769,93.553 h1.26 r270; Mechanical 7 "4" at 178.627,88.195 h1.26 r270; Mechanical 7 "3" at 171.769,89.079 h1.26 r270
U3: Mechanical 7 "1" at 109.422,116.173 h1.26